# Altium PCB Placa3.PcbDoc
Units mm, origin at the board's own origin, x right, y up, seen from the top; angles counter-clockwise.
Board outline 64 x 64 mm, 2 copper layers (Top Layer, Bottom Layer); 4 components, 15 nets, 47 pads, 0 vias.
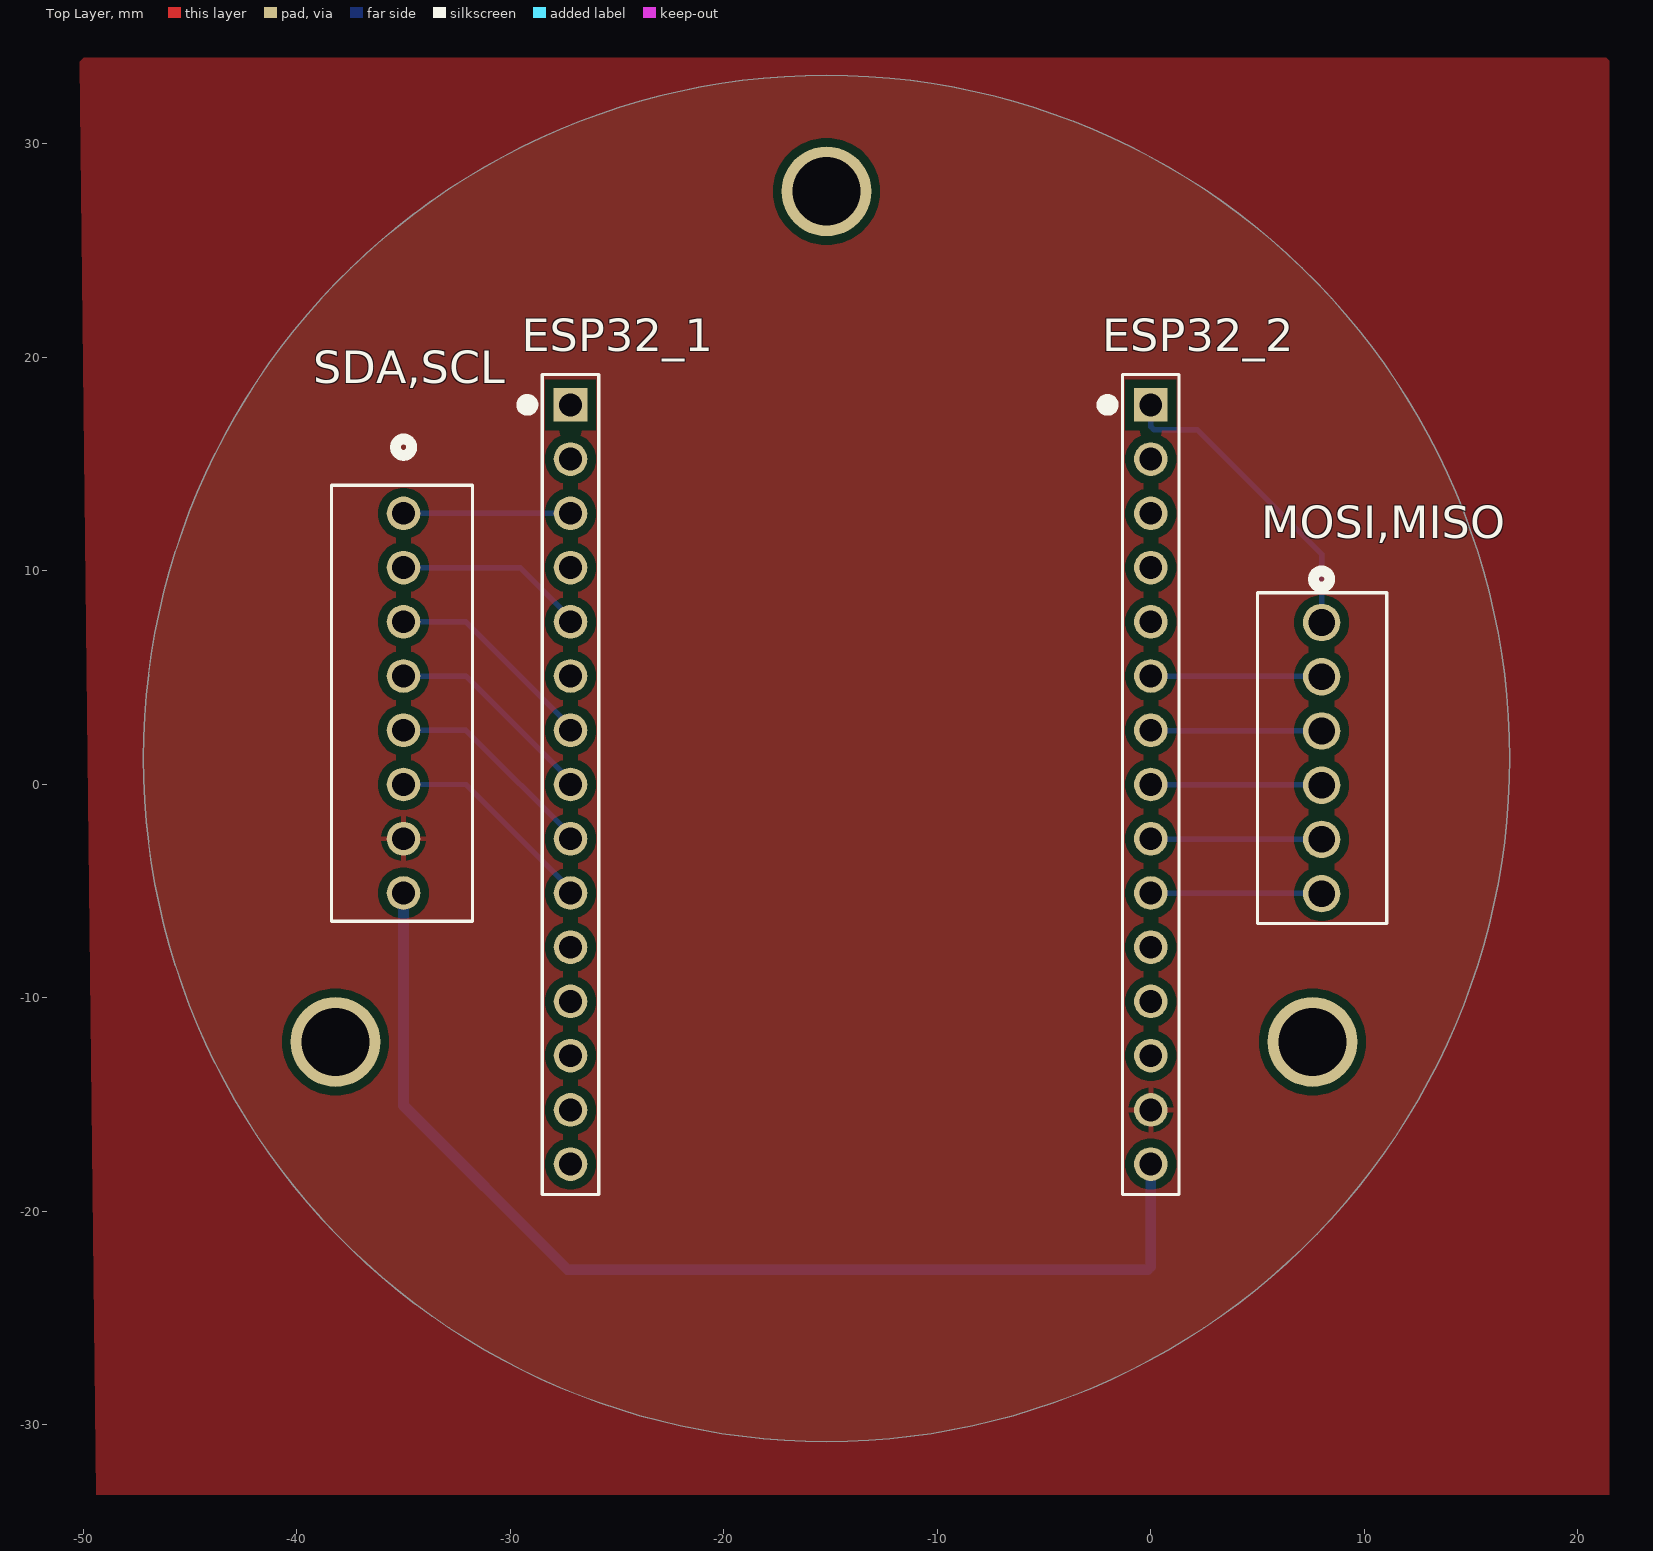
[diagram p0: Top Layer view]
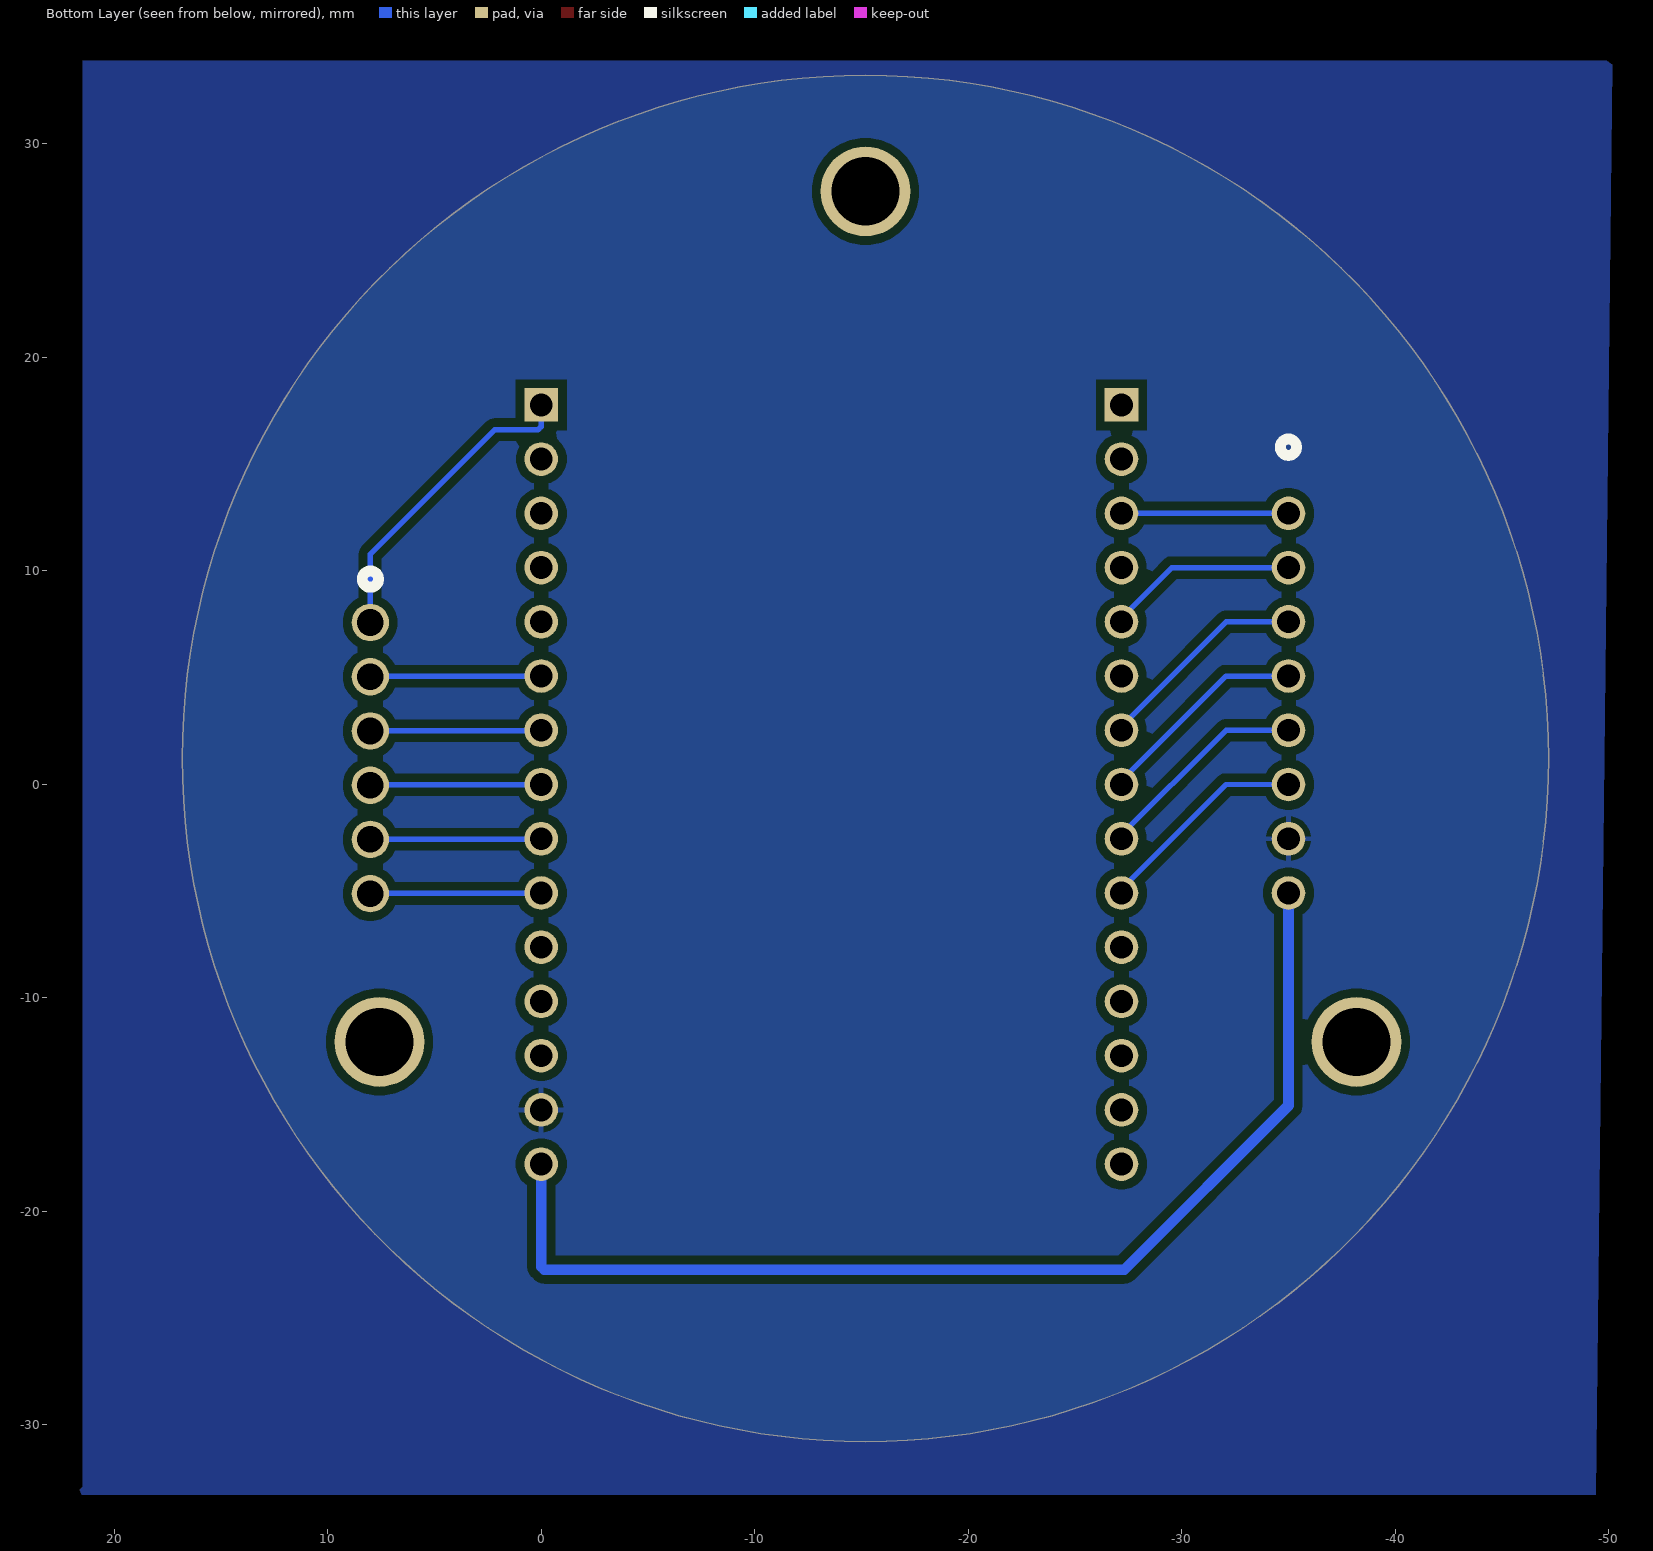
[diagram p1: Bottom Layer view, seen from below]

## Layer stack, top to bottom
Top Solder: solder mask 0.0102, Solder Resist, Dk 3.5
Top Layer: signal copper 0.0356
Dielectric 1: dielectric 0.32, FR-4, Dk 4.8
Bottom Layer: signal copper 0.0356
Bottom Solder: solder mask 0.0102, Solder Resist, Dk 3.5

## Board outline
-47.189,1.222 ccw(c-15.189,1.222) -15.189,-30.778 ccw(c-15.189,1.222) 16.811,1.222 ccw(c-15.189,1.222) -15.189,33.222 ccw(c-15.189,1.222)

## Design rules (kind name [scope] priority, off if disabled: settings)
Clearance [All] p1: gap=0.4 ignorepadtopadclearanceinfootprint=FALSE
HoleSize [All] p1: absolutevalues=TRUE maxlimit=6 minlimit=0.025 maxpercent=80.000 minpercent=20.000
PolygonConnect [All] p1: connectstyle=Relief reliefconductorwidth=0.254 reliefentries=4 polygonreliefangle="90 Angle" airgapwidth=0.254
RoutingVias [All] p1: holewidth=0.711 width=1.27 viastyle="Through Hole" minholewidth=0.711 minwidth=1.27 maxholewidth=0.711 maxwidth=1.27
SolderMaskExpansion [All] p1: expansion=0 istentingtop=FALSE
Width [All] p1: maxlimit=0.5 minlimit=0.254 preferedwidth=0.254
29 further rules are at their usual default settings.

## Components (designator, comment, footprint, x,y, rotation, side; value= is the part's Value field where it differs from the comment)
ESP32_1 "22032151" CONN15X1_22032151_MOL -27.178,17.78 r270 top
ESP32_2 "22032151" CONN15X1_22032151_MOL 0,17.78 r270 top
MOSI,MISO "22272061" CONN_AE-6410-06A_MOL 8,7.587 r90 top
SDA,SCL "22112082" CONN_A-6373-08A_MOL -35,12.7 r270 top

## Footprints (in the part's own frame and the unit in brackets; to place one, negate y for a bottom-side part, rotate by r counter-clockwise, add the part's x,y. Pads: shape width x height; smd on the part's side, far side on the other; paste and mask are expansions set on the pad)
CONN15X1_22032151_MOL [mil]
  rect 62x62 / inner round 62 / far side rect 62x62 hole 42: 1(0,0)
  round 62 hole 42: 2(100,0) 3(200,0) 4(300,0) 5(400,0) 6(500,0) 7(600,0) 8(700,0) 9(800,0) 10(900,0) 11(1000,0) 12(1100,0) 13(1200,0) 14(1300,0) 15(1400,0)
  silkscreen extent -56,-90 1456,52
CONN_A-6373-08A_MOL [mil]
  round 62 hole 42: 1(0,0) 2(100,0) 3(200,0) 4(300,0) 5(400,0) 6(500,0) 7(600,0) 8(700,0)
  silkscreen extent -137,-133 752,127
CONN_AE-6410-06A_MOL [mil]
  round 69 hole 49: 1(0,0) 2(-100,0) 3(-200,0) 4(-300,0) 5(-400,0) 6(-500,0)
  silkscreen extent -555,-120 95,118

## Part data
ESP32_1 ESP32_2: "Conn Unshrouded Header HDR 15 POS 2.54mm Solder ST Thru-Hole KKÂ® Bag", Package=None, Check_prices=https://www.snapeda.com/parts/22032151/Molex/view-part/?ref=eda, MF=Molex, MP=22032151, SnapEDA_Link=https://www.snapeda.com/parts/22032151/Molex/view-part/?ref=snap
MOSI,MISO: Package=None, Availability=Unavailable, MP=22272061, Price=None
SDA,SCL: "KKÂ® 254 Solid Header, Vertical, with Friction Lock, 8 Circuits, Gold (Au) Plating", Package=None, Check_prices=https://www.snapeda.com/parts/22-11-2082/Molex/view-part/?ref=eda, MF=Molex, MP=22-11-2082, SnapEDA_Link=https://www.snapeda.com/parts/22-11-2082/Molex/view-part/?ref=snap

## Free pads (board coordinates)
  round 4.2 hole 3.2: ""(-38.186,-12.057) ""(-15.189,27.78) ""(7.576,-12.057)

## Nets (pads, with @x,y where several pads share a name; then routed paths per layer and width w, separated by ;. In a path a pad name is that pad's centre, name@x,y a point inside that pad or via, vN(x,y) a via of type N, cw(c..) or ccw(c..) an arc to the next point about the centre after c; other vN are vias at no path point)
3.3V: ESP32_2.15 SDA,SCL.8 | length 53
  Bottom Layer w0.254: -0.149,-22.733 0,-22.584
  Bottom Layer w0.5: -35,-5.08 -35,-15.038 -27.305,-22.733 -0.149,-22.733 ; 0,-22.584 ESP32_2.15
"CLK MicroSD": ESP32_1.8 SDA,SCL.4 | length 10.1
  Bottom Layer w0.254: -35,5.08 -32.08,5.08 ESP32_1.8@-27,0
"CS MicoSD": ESP32_1.3 SDA,SCL.1 | length 8
  Bottom Layer w0.254: -35,12.7 ESP32_1.3@-27,12.7
"DIO0 LoRa": ESP32_1.7 SDA,SCL.3 | length 10.1
  Bottom Layer w0.254: -35,7.62 -32.08,7.62 ESP32_1.7@-27,2.54
GND: ESP32_2.14 SDA,SCL.7
GPS_RX: ESP32_2.10 MOSI,MISO.6 | length 8
  Bottom Layer w0.254: ESP32_2.10 0.016,-5.096 7.983,-5.096 8,-5.113
GPS_TX: ESP32_2.9 MOSI,MISO.5 | length 8
  Bottom Layer w0.254: ESP32_2.9 0.016,-2.556 7.983,-2.556 8,-2.573
"MISO SPI": ESP32_2.6 MOSI,MISO.2 | length 8
  Bottom Layer w0.254: ESP32_2.6 0.016,5.064 7.983,5.064 8,5.047
MonitorB: ESP32_1.11
"MOSI SPI": ESP32_2.1 MOSI,MISO.1 | length 14.7
  Bottom Layer w0.254: ESP32_2.1 0,16.757 0.149,16.608 2.188,16.608 8,10.796 8,7.587
"NSS LoRa": ESP32_2.8 MOSI,MISO.4 | length 8
  Bottom Layer w0.254: ESP32_2.8 0.016,-0.016 7.983,-0.016 8,-0.033
"RST LoRa": ESP32_1.5 SDA,SCL.2 | length 9.1
  Bottom Layer w0.254: -35,10.16 -29.54,10.16 ESP32_1.5@-27,7.62
"SCK SPI": ESP32_2.7 MOSI,MISO.3 | length 8
  Bottom Layer w0.254: ESP32_2.7 0.016,2.524 7.983,2.524 8,2.507
SCL_S: ESP32_1.9 SDA,SCL.5 | length 10.1
  Bottom Layer w0.254: -35,2.54 -32.08,2.54 ESP32_1.9@-27,-2.54
SDA_S: ESP32_1.10 SDA,SCL.6 | length 10.1
  Bottom Layer w0.254: -35,0 -32.08,0 ESP32_1.10@-27,-5.08
pads on no net: ESP32_1.1 ESP32_1.2 ESP32_1.4 ESP32_1.6 ESP32_1.12 ESP32_1.13 ESP32_1.14 ESP32_1.15 ESP32_2.2 ESP32_2.3 ESP32_2.4 ESP32_2.5 ESP32_2.11 ESP32_2.12 ESP32_2.13

## Polygon pours and split planes (outlines as drawn)
GND on Top Layer "NONET_L01_P-001" (solid, pour order 1): -50.165,34.036 21.336,34.036 21.463,33.909 21.463,-33.274 -49.403,-33.274
GND on Bottom Layer "NONET_L01_P-001" (solid, pour order 0): -50.165,34.036 -50.038,33.909 21.463,33.909 21.463,-32.893 21.844,-33.274 -49.403,-33.274

## Other copper
Top Layer:
  text "D" at 34.651,-70.332 h2.4
  text "N" at 36.266,-70.332 h2.4
  text "G" at 37.881,-70.332 h2.4

## Silkscreen, mask and mechanical layers (free items; w line width, h text height)
Mechanical 1:
  circle w0.254: c-15.189,1.222 r32